# Altium PCB MD52-影石电池版-260903-MCU.PcbDoc
Units mm, origin at the board's own origin, x right, y up, seen from the top; angles counter-clockwise.
Board outline 82 x 22 mm, 4 copper layers (Top Layer, Mid-Layer1, Mid-Layer2, Bottom Layer), stack 0.778 mm thick; 59 components, 75 nets, 186 pads, 129 vias.
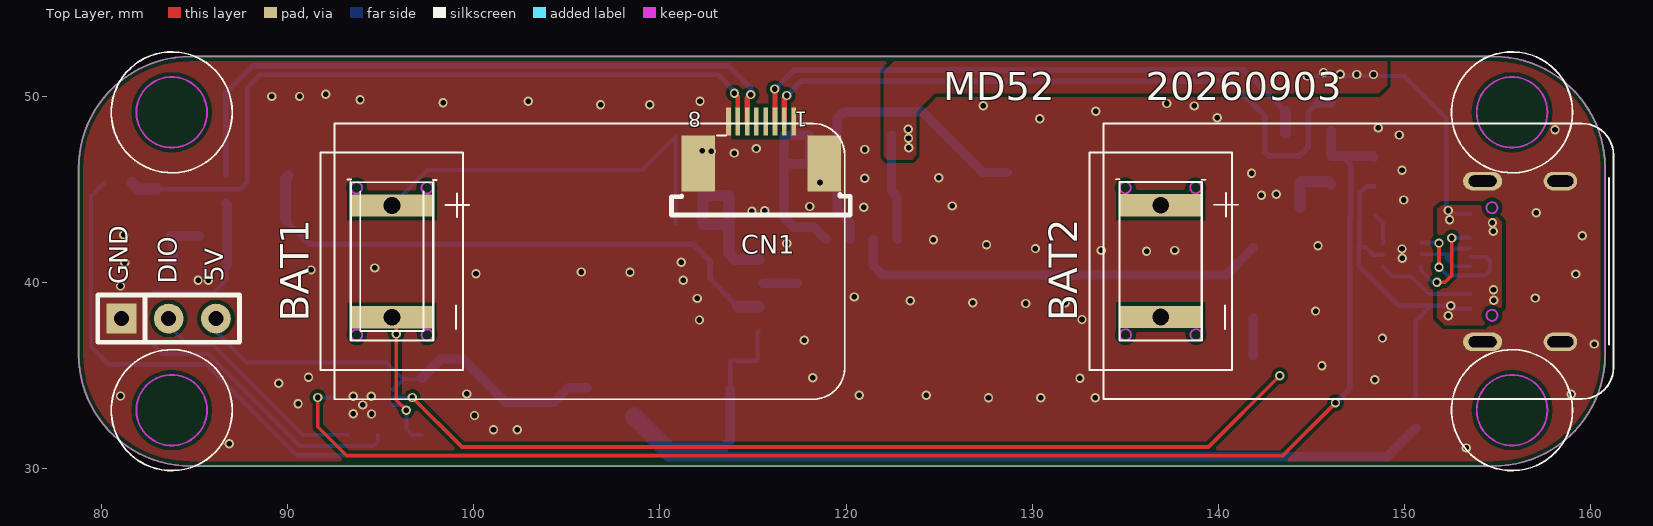
[diagram p0: Top Layer view]
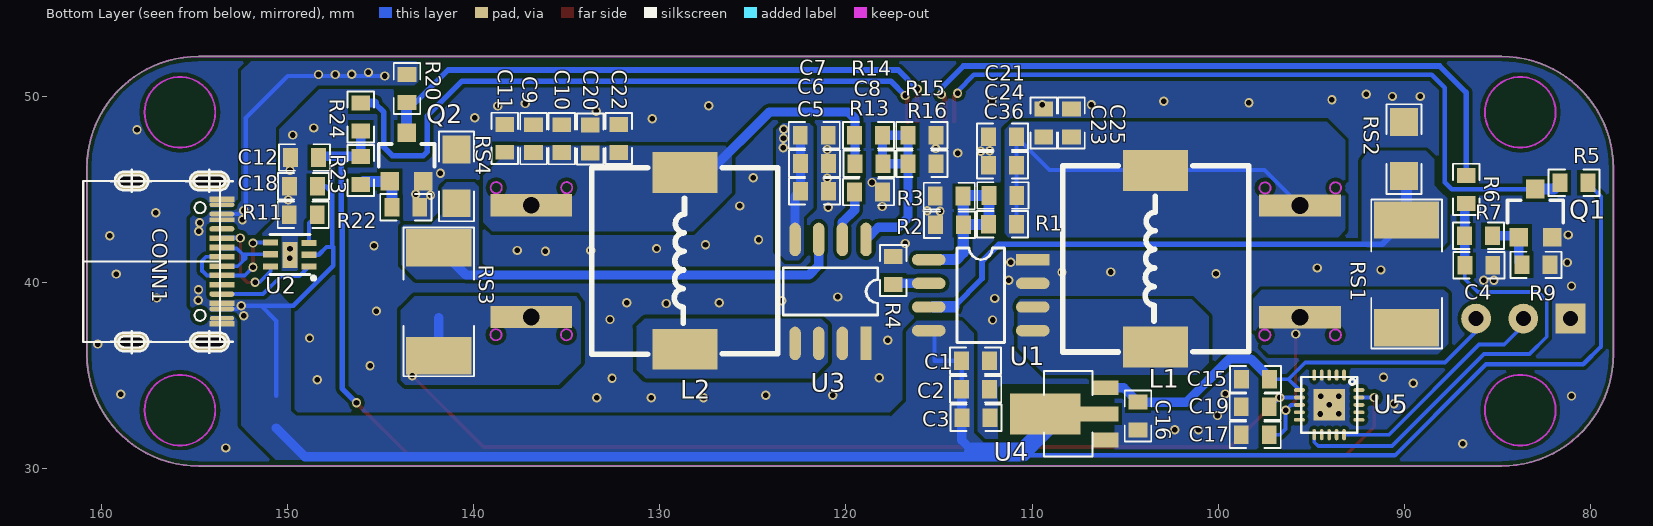
[diagram p1: Bottom Layer view, seen from below]

## Layer stack, top to bottom
Top Solder: solder mask 0.0102, Solder Resist, Dk 3.5
Top Layer: signal copper 0.0356
Dielectric 1: core 0.254, FR-4, Dk 4.2
Mid-Layer1: signal copper 0.036
Dielectric 3: prepreg 0.127, Dk 4.2
Mid-Layer2: signal copper 0.036
Dielectric 2: core 0.254, Dk 4.2
Bottom Layer: signal copper 0.0356
Bottom Solder: solder mask 0.0102, Solder Resist, Dk 3.5

## Board outline
78.774,36.137 ccw(c84.774,36.137) 84.774,30.137 154.774,30.137 ccw(c154.774,36.137) 160.774,36.137 160.774,46.137 ccw(c154.774,46.137) 154.774,52.137 84.774,52.137 ccw(c84.774,46.137) 78.774,46.137

## Design rules (kind name [scope] priority, off if disabled: settings)
Clearance [All] p1: gap=0.2
ComponentClearance [All] p1: gap=0 collisioncheckmode=3 verticalgap=0 showdistances=FALSE
PlaneConnect [All] p1: planeconnectstyle=Direct reliefexpansion=0.508 reliefentries=4 reliefconductorwidth=0.254 reliefairgap=0.254
PolygonConnect [All] p1: connectstyle=Direct reliefconductorwidth=0.254 reliefentries=4 polygonreliefangle="90 Angle" airgapwidth=0.254
RoutingVias [All] p1: holewidth=0.711 width=1.27 viastyle="Through Hole" minholewidth=0.3 minwidth=0.5 maxholewidth=0.711 maxwidth=1.27
SolderMaskExpansion [All] p1: expansion=0.102
Width [All] p1: maxlimit=10 minlimit=0.1 preferedwidth=0.15
28 further rules are at their usual default settings.

## Classes and differential pairs
component class HUSB337+SW6201+SW6201+SW6201+PY32F031(1)(3): C1 C3 C4 C6 C7 C9 C18 C21 C24 CONN1 L1 L2 R1 R3 R4 R6 R7 R9 R11 R14 R15 R16 RS3 RS4

## Components (designator, comment, footprint, x,y, rotation, side; value= is the part's Value field where it differs from the comment)
BAT1 "Comment" "电池座 -2-4PIN-2.0MM" 95.6,41.13 r90 top locked
BAT2 "Comment" "电池座 -2-4PIN-2.0MM" 136.9,41.14 r90 top locked
C1 "10uF/16V X7R 10%" 0603 113.04,35.79 r180 bottom locked
C2 "NC" 0603 113.03,34.26 r180 bottom locked (schematic designator C1)
C3 "NC" 0603 113.01,32.73 r180 bottom locked (schematic designator C9)
C4 "1uF/25V" 0603 86,40.93 r180 bottom locked
C5 "10uF/16V X7R 10%" 0603 121.69,44.9 r180 bottom locked (schematic designator C9)
C6 "10uF/16V X7R 10%" 0603 121.69,46.39 r180 bottom locked
C7 "NC" 0603 121.7,47.9 r180 bottom locked
C8 "1nf/50v" 0603 118.76,46.37 r180 bottom locked (schematic designator C7)
C9 "22uF/6.3V X5R" 0603 136.78,47.72 r90 bottom locked (schematic designator C3)
C10 "22uF/6.3V X5R" 0603 135.26,47.72 r90 bottom locked (schematic designator C3)
C11 "22uF/6.3V X5R" 0603 138.33,47.74 r90 bottom locked (schematic designator C3)
C12 "1uf/50v" 0603 149.09,46.71 r180 bottom locked (schematic designator C3)
C15 "2.2uf/50v" 0603 98,34.8 r0 bottom locked (schematic designator C3)
C16 "0.1uf/50v" 0603 104.31,32.82 r270 bottom locked (schematic designator C3)
C17 "0.1uf/50v" 0603 98.01,31.82 r180 bottom locked (schematic designator C3)
C18 "1uF/50V X7R 10%" 0603 149.13,45.16 r0 bottom locked
C19 "0.1uf/50v" 0603 98.01,33.32 r180 bottom locked (schematic designator C3)
C20 "22uF/6.3V X5R" 0603 133.74,47.71 r90 bottom locked (schematic designator C3)
C21 "22uF/6.3V X5R" 0603 111.59,47.82 r0 bottom locked
C22 "22uF/6.3V X5R" 0603 132.21,47.73 r90 bottom locked (schematic designator C3)
C23 "22uF/6.3V X5R" 0603 109.38,48.56 r90 bottom locked (schematic designator C3)
C24 "22uF/6.3V X5R" 0603 111.59,46.29 r0 bottom locked (schematic designator C27)
C25 "22uF/6.3V X5R" 0603 107.88,48.57 r90 bottom locked (schematic designator C3)
C36 "1nF/50V" 0603 111.57,44.67 r180 bottom locked (schematic designator C14)
CN1 "" 连接器0.5*8 115.45,47.52 r180 top locked
CONN1 "输入" "SMD-TYPEC_16Pin 卧式" 152.939,36.805 r0 bottom locked
L1 "4.7uH" "SMD-L WHC1040 锡膏" 103.36,36.52 r90 bottom locked
L2 "4.7uH" "SMD-L WHC1040 锡膏" 128.65,36.41 r90 bottom locked (schematic designator L3)
Q1 "2N7002" SOT323 82.96,43.82 r90 bottom locked
Q2 "2N7002" SOT323 143.6,46.83 r90 bottom locked
R1 "27K" 0603 111.58,43.12 r0 bottom locked
R2 "10K" 0603 114.44,43.1 r180 bottom locked (schematic designator R1)
R3 "470K" 0603 114.45,44.64 r180 bottom locked
R4 "82K" 0603 117.45,40.64 r90 bottom locked
R5 "10K" 0603 80.88,45.36 r0 bottom locked (schematic designator R1)
R6 "910k" 0603 86.68,45 r90 bottom locked
R7 "10K" 0603 86.01,42.5 r0 bottom locked
R9 "100K" 0603 82.93,40.94 r180 bottom locked
R11 "NC" 0603 149.15,43.64 r0 bottom locked
R13 "82K" 0603 118.78,44.86 r180 bottom locked (schematic designator R4)
R14 "27k" 0603 118.78,47.91 r180 bottom locked
R15 "470k" 0603 115.92,47.91 r180 bottom locked
R16 "10k" 0603 115.91,46.38 r180 bottom locked
R20 "10K" 0603 143.58,50.41 r270 bottom locked (schematic designator R4)
R22 "100K" 0603 143.64,44.03 r180 bottom locked (schematic designator R4)
R23 "10K" 0603 146.06,46.02 r270 bottom locked (schematic designator R4)
R24 "10K" 0603 146.06,48.89 r270 bottom locked (schematic designator R4)
RS1 "0.2/2WR" 2512 89.88,40.46 r270 bottom locked (schematic designator R4)
RS2 "30mR" 1206 90.02,47.16 r90 bottom locked (schematic designator R18)
RS3 "0.2R" 2512 141.87,38.96 r270 bottom locked (schematic designator R4)
RS4 "30mR" 1206 140.91,45.7 r270 bottom locked (schematic designator R21)
U1 "SP1233FL" SO8 115.55,41.22 r180 bottom locked
U2 "HUSB237" HUSB237 149.659,41.155 r0 bottom locked
U3 "SP1233FL" SO8 118.92,42.31 r270 bottom locked
U4 "ME6203A50PG" SOT-89 108.06,32.94 r0 bottom locked
U5 "WY8S8002A" QFN3*3-20 94.04,33.42 r270 bottom locked
? "" SIP3 81.07,38.06 r0 top locked

## Footprints (in the part's own frame and the unit in brackets; to place one, negate y for a bottom-side part, rotate by r counter-clockwise, add the part's x,y. Pads: shape width x height; smd on the part's side, far side on the other; paste and mask are expansions set on the pad)
0603 [mm]
  rect 0.8x1 smd: 1(0.75,0) 2(-0.75,0)
  silkscreen extent -1.37,-0.71 1.37,0.71
1206 [mm]
  rect 1.5x1.5 smd: 1(1.448,0) 2(-1.448,0)
  silkscreen extent -2.41,-0.94 2.41,0.94
2512 [mm]
  rect 2x3.5 smd: 1(2.9,0) 2(-2.9,0)
  silkscreen extent -4,-1.9 4,1.9
HUSB237 [mil]
  rect 31.5x13.23 smd: "1 CC1"(-32,12) "2 VBUS"(-32,-13) "3 VSET"(-32,-38) "4 D+"(49,-39) "5 D-"(49,-14) "6 "(49,12)
  rect 31.5x55.12 smd: EP(8,-13)
  silkscreen extent -45,-56 50,40
QFN3*3-20 [mm]
  oval 0.6x0.2 smd: 1(-1.6,0.8) 2(-1.6,0.4) 3(-1.6,0) 4(-1.6,-0.4) 5(-1.6,-0.8) 11(1.6,-0.8) 12(1.6,-0.4) 13(1.6,0) 14(1.6,0.4) 15(1.6,0.8)
  oval 0.2x0.6 smd: 6(-0.8,-1.6) 7(-0.4,-1.6) 8(0,-1.6) 9(0.4,-1.6) 10(0.8,-1.6) 16(0.8,1.6) 17(0.4,1.6) 18(0,1.6) 19(-0.4,1.6) 20(-0.8,1.6)
  rect 1.7x1.7 smd: 21(0,0)
  silkscreen extent -1.5,-1.5 1.5,1.5
SIP3 [mm]
  rect 1.6x1.6 hole 0.8: 1(0,0)
  round 1.6 hole 0.8: 2(2.54,0)
  round 1.6 hole 0.813: 3(5.08,0)
  silkscreen extent -1.27,-1.27 6.35,1.27
"SMD-L WHC1040 锡膏" [mm]
  rect 2.2x3.5 smd: 1(0,0) 2(9.492,0)
  silkscreen extent -0.26,-5 9.75,5, body extent -0.45,-5 9.95,5, height 3.9
"SMD-TYPEC_16Pin 卧式" [mm]
  oval 2.1x1 hole 0.6 slot 1.5 at 0 deg: 0(1.253,-8.64) 0(1.253,0)
  oval 1.8x1 hole 0.6 slot 1.4 at 0 deg: 0(5.433,-8.64) 0(5.433,0)
  round 0.3 on Bottom Overlay: 0(8.033,-4.32)
  rect 1.34x0.3 smd: A1(0.583,-7.67) A5(0.583,-5.57) A6(0.583,-4.57) A7(0.583,-4.07) A8(0.583,-3.07) A12(0.583,-0.97) B4(0.583,-2.07) B6(0.583,-3.57) B7(0.583,-5.07)
  oval 1.34x0.25 smd: A4(0.583,-6.87) A9(0.583,-1.77) B12(0.583,-7.37)
  oval 1.3x0.25 smd: B1(0.583,-1.27)
  oval 1.34x0.3 smd: B5(0.583,-2.57) B8(0.583,-6.07)
  rect 1.34x0.25 smd: B9(0.583,-6.57)
  Keep-Out Layer circle w0.1: c1.753,-1.43 r0.3
  Keep-Out Layer circle w0.1: c1.753,-7.21 r0.3
  silkscreen extent -0.03,-9.25 8.03,0.64
SO8 [mil]
  oval 70.87x24 smd: 1(0,0) 2(0,-50) 3(0,-100) 4(0,-150) 5(220,-150) 6(220,-100) 7(220,-50)
  rect 70.87x24 smd: 8(220,0)
  silkscreen extent 60,-175 160,25
SOT323 [mm]
  rect 1x1 smd: 1(-1.4,0.9) 2(1.2,0) 3(-1.4,-0.9)
  silkscreen extent -0.6,-1.5 0.6,1.5
SOT-89 [mm]
  rect 1.4x0.8 smd: 1(-2,1.4) 3(-2,-1.4)
  rect 5x0.8 smd: 2(-0.2,0)
  rect 3.8x2.2 smd: 2(1.225,0)
  silkscreen extent -1.3,-2.3 1.3,2.3
"电池座 -2-4PIN-2.0MM" [mm]
  rect 1.2x4.4 hole 0.9: 1(-3,0) 4(3,0)
  Keep-Out Layer circle w0.1: c-3.95,-1.898 r0.3
  Keep-Out Layer circle w0.1: c3.95,1.902 r0.3
  Keep-Out Layer circle w0.1: c-3.951,1.892 r0.3
  Keep-Out Layer circle w0.1: c3.949,-1.883 r0.3
  silkscreen extent -4.25,-4.14 4.4,2.4
连接器0.5*8 [mm]
  rect 0.25x1.5 smd paste+0 mask+0.051: 1(-1.732,-1.132) 2(-1.232,-1.132) 3(-0.732,-1.132) 4(-0.232,-1.132) 5(0.268,-1.132) 6(0.768,-1.132) 7(1.268,-1.132) 8(1.768,-1.132)
  rect 1.8x3 smd paste+0 mask+0.051: 9(3.388,1.132) 10(-3.388,1.122)
  silkscreen extent -4.78,-0.38 4.83,3.9

## Part data
C1 C2 C3 C4 C5 C6 C7 C8 C9 C10 C11 C12 C15 C16 C17 C19 C20 C21 C22 C23 C24 C25 C36: library part CAP0603, "Capacitor"
C18: library part Cap, "Capacitor"
CONN1: library part "TYPC C"
L1 L2: library part INDUCTOR_SPM1010, "INDUCTOR"
R1 R2 R3 R4 R5 R6 R7 R9 R11 R13 R14 R15 R16 R20 R22 R23 R24 RS1 RS2 RS3 RS4: library part RES_0603, "Resistor"

## Via types
v1: diameter 0.5, hole 0.3, Top Layer to Bottom Layer, 129 vias

## Nets (pads, with @x,y where several pads share a name; then routed paths per layer and width w, separated by ;. In a path a pad name is that pad's centre, name@x,y a point inside that pad or via, vN(x,y) a via of type N, cw(c..) or ccw(c..) an arc to the next point about the centre after c; other vN are vias at no path point)
12V: 
a1: "U2.3 VSET" R11.2 | length 1.7
  Bottom Layer w0.2: R11.2 148.846,43.194 148.846,42.12
a2: BAT1.1 C17.1 RS1.1 U5.8 | length 8.1
  Top Layer w0.2: BAT1.1 95.84,37.89 95.84,33.67 v1(96.38,33.13)
  Bottom Layer w0.2: U5.8 96.09,33.42 v1(96.38,33.13) 96.38,32.12 96.68,31.82 C17.1@97.21,31.82
  other v1: 95.83,37.23
a3: Q1.1 R7.2 R9.2 | length 3.2
  Bottom Layer w0.5: R9.2 83.86,41.12 Q1.1 Q1.1@83.94,42.5 ; Q1.1@83.72,42.5 R7.2
a4: C4.2 R6.2 R7.1 U5.11 | length 26.3
  Bottom Layer w0.2: C4.2 86.75,40.17 86.06,39.48 82.81,39.48 82.35,39.02 82.35,37.08 83.28,36.15 85.72,36.15 90.66,31.21 94.63,31.21 94.84,31.42 U5.11
  Bottom Layer w0.5: R6.2 86.75,44.18 C4.2
a5: 
a6: ?.3 C15.2 C16.2 U4.3 U5.6 | length 24.2
  Bottom Layer w0.2: ?.3 86.15,37.37 87.82,35.7 95.32,35.7 96.22,34.8 ; U5.6 96.22,34.8 ; C15.2@97.19,34.8 96.22,34.8
  Bottom Layer w0.5: C15.2@97.19,34.836 98.244,35.89 99.39,35.89 101.71,33.57 C16.2 105.08,34.34 U4.3
a7: R13.2 U3.2 | length 2.8
  Bottom Layer w0.5: R13.2 119.53,43.89 120.19,43.23 U3.2
A8: CONN1.A8
a9: BAT2.1 C19.1 RS3.1 U5.7 | length 53.1
  Top Layer w0.2: v1(96.7,33.82) 99.36,31.16 139.47,31.16 v1(143.3,34.99)
  Bottom Layer w0.2: U5.7 v1(96.7,33.82) C19.1@97.2,33.32
  Bottom Layer w0.5: RS3.1 141.87,38.11
b0: C12.1 R23.2 R24.1 U5.19 | length 76.3
  Top Layer w0.2: v1(91.62,33.82) 91.62,32.25 93.18,30.69 143.45,30.69 v1(146.29,33.53)
  Bottom Layer w0.2: v1(91.62,33.82) U5.19
  Bottom Layer w0.3: v1(146.29,33.53) 147.065,34.305 147.065,43.495 ; 146.66,46.77 147.12,46.31 147.12,43.55
  Bottom Layer w0.5: R24.1@146.07,48.15 R24.1 R23.2 146.66,46.77 148.28,46.77 C12.1
b1: Q2.1 R22.2 R23.1 | length 3.1
  Bottom Layer w0.58: R22.2 144.39,45.32 144.49,45.42 145.91,45.42 R23.1
b2: 
b3: 
b4: R4.2 U1.2 | length 1.8
  Bottom Layer w0.5: U1.2 R4.2@117.39,39.95
b5: 
b6: 
b7: 
B8: CONN1.B8
b9: 
BST1: 
BST2: 
CC1: "U2.1 CC1" CONN1.B5 | length 5.3
  Bottom Layer w0.2: 148.846,40.85 149.371,40.325 150.359,40.325 151.309,39.375 CONN1.B5
CC2: "U2.6 " CONN1.A5 | length 6.1
  Top Layer w0.2: v1(151.739,40.005) 152.169,40.005 152.539,40.375 v1(152.539,42.385)
  Bottom Layer w0.2: 150.903,40.85 150.903,40.6 151.499,40.005 v1(151.739,40.005) ; v1(152.539,42.385) 152.549,42.375 CONN1.A5 153.472,42.425 v1@152.746,42.425
cs1: RS1.2 RS2.2 U1.3 | length 30.3
  Bottom Layer w0.3: RS1.2 91.19,42.05 111.78,42.05 112.69,41.14 112.69,40.2 114.2,38.69
  Bottom Layer w0.6: RS1.2 89.88,45.572 RS2.2 ; 114.2,38.69 U1.3@115.32,38.69
cs2: RS3.2 RS4.1 U3.3 | length 22.6
  Bottom Layer w0.5: U3.3 121.46,40.92 121.98,40.4 140.41,40.4 RS3.2
dio: ?.2 U5.15 | length 12.3
  Bottom Layer w0.2: ?.2@83.415,37.885 84.64,36.66 85.99,36.66 90.83,31.82 U5.15
DM: "U2.5 D-" CONN1.A7 CONN1.B7 | length 5.3
  Bottom Layer w0.2: 150.903,41.51 152.256,41.51 ; 152.259,41.345 152.279,41.365 ; CONN1.A7 152.669,40.875 152.402,41.141 ; CONN1.B7 153.472,41.825 152.727,41.825 ; 152.256,41.51 152.256,41.287 152.402,41.141 ; 152.256,41.51 152.413,41.51 152.727,41.825 ; 152.402,41.141 152.402,41.365 152.402,41.499 152.727,41.825
DP: "U2.4 D+" CONN1.A6 CONN1.B6 | length 7
  Top Layer w0.2: v1(151.849,42.115) 151.849,40.825 v1(151.852,40.821)
  Bottom Layer w0.2: 150.903,42.145 151.818,42.145 v1(151.849,42.115) ; v1(151.852,40.821) 152.299,40.375 CONN1.B6 154.319,40.375 154.563,40.619 154.589,40.619 154.589,41.165 154.379,41.375 CONN1.A6
FB1: C36.2 R1.1 R2.1 R3.1 U1.1 | length 9.1
  Bottom Layer w0.6: R2.1 113.67,43.12 R1.1 112.32,43.13 C36.2 113.67,44.67 R3.1 113.7,41.6 114.07,41.23 U1.1@115.32,41.23
FB2: C8.1 R14.1 R15.2 R16.2 U3.1 | length 11.4
  Bottom Layer w0.5: U3.1 118.26,42.97 117.17,42.97 116.66,43.48 R16.2 ; R16.2 116.66,47.9 R15.2 R14.1 118.03,46.39 C8.1 116.67,46.37 R16.2
GND: ?.1 C1.1 C2.1 C3.1 C4.1 C5.1 C6.1 C7.1 C9.1 C10.1 C11.1 C12.2 C15.1 C16.1 C17.2 C18.1 C19.2 C20.1 C21.1 C22.1 C23.1 C24.1 C25.1 CN1.1 CN1.8 CN1.9 CN1.10 CONN1.0@154.192,36.805 CONN1.0@154.192,45.445 CONN1.0@158.372,36.805 CONN1.0@158.372,45.445 CONN1.A1 CONN1.A12 CONN1.B1 CONN1.B12 Q1.3 Q2.3 R2.2 R3.2 R4.1 R9.1 R11.1 R13.1 R15.1 R16.1 R22.1 RS2.1 RS4.2 U1.7 U1.8 U2.EP U3.7 U3.8 U4.1 U5.4 U5.21
  other v1: 153.32,31.11 86.87,31.34 101.06,32.08 102.33,32.08 100.04,32.85 94.51,32.93 93.52,32.94 94.04,33.42 90.56,33.48 127.65,33.81 130.46,33.81 133.38,33.81 81.02,33.9 93.52,33.88 94.5,33.89 120.71,33.94 124.31,33.94 158.96,33.99 99.63,34.01 89.53,34.58 148.4,34.78 132.56,34.85 118.21,34.88 91.12,34.9 145.56,35.53 160.19,36.69 117.76,36.9 148.81,37.01 112.12,37.98 132.67,38.01 145.22,38.46 129.65,38.87 126.81,38.91 131.77,38.91 123.45,39.01 112,39.14 157.02,39.16 120.43,39.22 81.02,39.81 85.19,40.11 85.74,40.11 111.26,40.12 159.19,40.45 100.12,40.46 108.39,40.55 105.77,40.56 91.26,40.67 94.68,40.78 81.25,41.07 111.15,41.09 149.872,41.295 136.14,41.68 133.71,41.72 137.66,41.72 149.86,41.8 130.17,41.82 145.35,41.97 127.54,42.03 116.81,42.09 124.69,42.3 159.54,42.51 81.2,42.55 157.08,43.74 114.94,43.83 115.63,43.85 120.94,44.04 118.05,44.08 125.7,44.11 149.95,44.43 142.31,44.69 143.11,44.74 118.6,45.37 121,45.6 124.98,45.62 141.78,45.86 149.86,46.02 113.99,46.95 112.76,47.05 112.28,47.07 121.01,47.14 115.18,47.19 149.71,47.92 158.08,48.2 148.58,48.3 130.41,48.79 139.93,48.85 133.41,49.2 127.36,49.49 138.7,49.48 106.81,49.55 109.45,49.55 137.23,49.61 98.35,49.65 102.93,49.73 112.15,49.73 93.89,49.82 89.15,49.99 90.64,49.99 92.04,50.11
GND1: 
LEDG_1: CN1.7 Q1.2 R5.1 | length 40.1
  Top Layer w0.25: v1(114,50.17) 114.182,49.988 CN1.7
  Bottom Layer w0.25: Q1.2 82.98,45 87.46,45 87.83,45.37 87.83,50.45 88.53,51.15 113.13,51.15 114,50.28 v1(114,50.17)
  Bottom Layer w0.6: R5.1 81.97,45.02 Q1.2
LEDG_2: CN1.3 Q2.2 R20.1 | length 31.7
  Top Layer w0.25: v1(116.17,50.39) 116.182,50.378 CN1.3
  Bottom Layer w0.3: v1(116.17,50.39) 117.19,51.41 141.37,51.41 143.6,49.18
  Bottom Layer w0.58: Q2.2 143.6,49.18
LEDG_3: 
LEDR_1: CN1.6 R6.1 | length 35.6
  Top Layer w0.3: CN1.6 114.682,49.892 v1(114.88,50.09)
  Bottom Layer w0.3: R6.1 86.68,50.202 88.103,51.625 113.685,51.625 114.87,50.44 114.87,50.1 v1(114.88,50.09)
LEDR_2: CN1.2 R24.2 | length 36.1
  Top Layer w0.3: CN1.2 116.682,49.902 v1(116.82,50.04)
  Bottom Layer w0.3: v1(116.82,50.04) 117.59,50.81 140.62,50.81 142.5,48.93 142.5,47.01 142.7,46.81 144.37,46.81 144.82,47.26 144.82,49.14 145.32,49.64
  Bottom Layer w0.5: 145.32,49.64 R24.2
LEDR_3: 
NetC14_1: 
NetC14_2: 
NetC15_1: 
NetC15_2: 
NetC16_1: 
NetC16_2: 
NetC17_1: 
NetC18_2: 
NetC19_1: 
NetC20_1: 
NetC21_2: 
NetC22_2: 
NetC23_2: 
NetNTC1_2: 
NetNTC2_2: 
NetNTC3_2: 
NetQ1_1: 
NetR1_2: 
NetR2_2: 
NetR3_2: 
NetR4_2: 
NetR5_2: 
NetR6_2: 
NetR15_2: 
NetR16_2: 
NetR17_2: 
NetR19_1: 
NetR22_1: 
NetR23_1: 
NewNet: 
SW1: L1.1 U1.5 U1.6
SW2: L2.1 U3.5 U3.6
VBAT1: BAT1.4 C21.2 C23.2 C24.2 C25.2 C36.1 L1.2 R1.2 | length 21.4
  Bottom Layer w0.2: BAT1.4 95.6,44.134 97.508,46.042 103.07,46.042 109.062,46.042 110.83,47.81 R1.2
VBAT2: BAT2.4 C8.2 C9.2 C10.2 C20.2 C22.2 L2.2 R14.2 | length 13.1
  Bottom Layer w0.5: C8.2 119.51,48.8 119.87,49.16 124.11,49.16 127.368,45.902 L2.2
VBAT3: 
VIN: "U2.2 VBUS" C1.2 C2.2 C3.2 C5.2 C6.2 C7.2 C18.2 CONN1.A4 CONN1.A9 CONN1.B4 CONN1.B9 R5.2 R20.2 U1.4 U3.4 U4.2 | length 134
  Bottom Layer w0.23: R5.2@80.18,45.36 79.44,44.62 79.44,36.55 80.39,35.6 85.62,35.6 86.26,34.96 90.51,30.71 111.09,30.71 111.27,30.89 ; C2.2 113.78,35.78 C1.2 115.24,35.79 115.24,37.34 U1.4@115.32,37.42 ; v1(144.77,51.09) 149.98,51.09 152.24,48.83 152.24,43.973 v1(152.349,43.865) ; 147.54,41.9 147.903,41.9 148.318,41.485 148.846,41.485 ; 150.6,33.91 150.6,37.93 151.423,38.753 ; 152.02,38.753 v1(152.479,38.753) ; v1@152.299,43.495 v1(152.419,43.375) ; v1@152.439,43.865 152.629,43.675 CONN1.A4 ; 152.719,38.575 CONN1.A9
  Bottom Layer w0.25: C18.2 147.935,45.16 147.595,44.82 147.595,41.955 147.54,41.9 147.54,40.89 149.677,38.753 151.423,38.753 152.02,38.753
  Bottom Layer w0.5: 112.897,30.637 149.057,30.637 150.6,32.18 ; 113.15,30.89 113.78,31.52 C2.2 ; C7.2 122.44,47.89 C6.2 C5.2 122.73,44.61 U3.4
  Bottom Layer w1: U4.2@108.63,32.77 110.51,30.89 111.27,30.89 113.15,30.89
  other v1: 152.339,38.215 154.799,39.045 154.779,39.605 154.769,42.745 154.719,43.205 123.36,47.24 123.35,47.74 123.34,48.23 147.43,51.17 148.33,51.17 146.55,51.18 145.65,51.28
pads on no net: C11.2 CN1.4 CN1.5 CONN1.0@160.972,41.125 U5.1 U5.2 U5.3 U5.5 U5.9 U5.10 U5.12 U5.13 U5.14 U5.16 U5.17 U5.18 U5.20

## Polygon pours and split planes (outlines as drawn)
GND on Bottom Layer "Bottom Layer-No Net" (solid, remove dead copper, pour order 22): 152.859,38.215 152.859,36.695 153.019,36.535 153.349,36.205 153.919,36.205 155.106,36.205 155.229,36.327 155.229,37.685 155.039,37.875 154.689,38.225 154.249,38.225
VBAT1 on Bottom Layer "Bottom Layer-No Net" (solid, remove dead copper, pour order 16): 93.19,42.79 93.54,42.44 111.27,42.44 111.48,42.65 111.48,42.76 111.48,48.21 111.17,48.52 111.06,48.63 109.65,48.63 94.18,48.63 93.18,47.63 93.18,42.78
SW1 on Bottom Layer "Bottom Layer-No Net" (solid, remove dead copper, pour order 18): 101.14,35.04 109.33,35.04 110.66,36.37 110.78,36.49 110.78,38.94 110.63,39.09 110.24,39.09 101.42,39.09 100.5,38.17 100.5,35.68
SW2 on Bottom Layer "Bottom Layer-No Net" (solid, remove dead copper, pour order 19): 120.97,35.71 120.97,37.69 121.28,38 121.33,38.05 130.42,38.05 130.81,38.05 131.25,37.61 131.23,37.59 131.23,35.99 131.23,35.31 130.76,34.84 121.87,34.84 121.85,34.82
VIN on Bottom Layer "Bottom Layer-No Net" (solid, remove dead copper, pour order 21): 116.2,37.94 113.79,37.94 113.49,37.64 113.12,37.27 113.12,35.1 113.12,31.92 111.68,30.48 150.64,30.48 152.04,31.88 152.49,32.33 152.49,37.62 152.49,38.08 152.7,38.29 152.75,38.34 154.29,38.34 154.82,38.34 155.12,38.64 155.22,38.74 155.22,43.44 154.77,43.89 154.13,43.89 152.97,43.89 152.78,44.08 152.47,44.39 152.47,44.43 152.47,51.36 152.11,51.72 151.83,52 144.12,52 143.16,52 142.98,51.82 142.98,50.78 143.18,50.58 144.09,50.58 148.37,50.58 150.64,48.31 150.64,43.64 151.73,42.55 151.73,40.73 150.83,39.83 149.81,38.81 149.81,36.77 149.81,33.11 149.53,32.83 117.65,32.83 117.6,32.78 116.77,33.61 116.77,33.69 116.77,37.36 116.63,37.5
a9 on Bottom Layer "Bottom Layer-No Net" (solid, remove dead copper, pour order 23): 134.48,39.25 143.17,39.25 143.7,38.72 143.91,38.51 143.91,36.36 143.91,34.74 143.77,34.6 143.66,34.49 142.64,34.49 135.42,34.49 134.24,35.67 134.24,38.91
VBAT2 on Bottom Layer "Bottom Layer-No Net" (solid, remove dead copper, pour order 24): 126.48,47.35 137.85,47.35 138.22,46.98 139.47,45.73 139.47,44.81 139.47,43.23 139.23,42.99 138.99,42.75 138.33,42.75 128.2,42.75 126.89,44.06 126.13,44.82 126.13,46.8
cs1 on Bottom Layer "Bottom Layer-No Net" (solid, remove dead copper, pour order 25): 92.29,46.56 92.29,42.16 92.03,41.9 87.95,41.9 87.7,42.15 87.7,43.53 87.7,44.51 88.09,44.9 88.4,45.21 88.4,45.93 88.4,46.62 88.75,46.97 88.85,47.07 91.94,47.07
cs2 on Bottom Layer "Bottom Layer-No Net" (solid, remove dead copper, pour order 26): 139.71,45.14 139.71,40.95 139.18,40.42 139.44,40.16 141.15,40.16 143.09,40.16 143.71,40.78 143.88,40.95 143.88,42.85 143.88,42.97 143.78,43.07 143.75,43.1 143.11,43.1 142.28,43.1 142.16,43.22 141.72,43.66 141.72,45.09 141.44,45.37 139.97,45.37
VIN on Bottom Layer "Bottom Layer-No Net" (solid, remove dead copper, pour order 27): 122.27,41.48 122.27,43.5 122.06,43.71 121.75,44.02 121.75,44.82 121.75,48.35 121.93,48.53 121.95,48.55 123.06,48.55 123.38,48.55 123.5,48.43 123.73,48.2 123.73,44.12 123.73,41.69 123.47,41.43 123.23,41.19 122.98,41.19 122.52,41.19
GND on Bottom Layer "Bottom Layer-No Net" (solid, remove dead copper, pour order 30): 78.74,35.98 78.74,33.6 82.26,30.08 157.26,30.08 160.78,33.6 160.78,48.63 157.25,52.16 82.26,52.16 78.82,48.72
a2 on Bottom Layer "Bottom Layer-No Net" (solid, remove dead copper, pour order 17): 87.88,39.6 97.66,39.6 97.88,39.38 98.13,39.13 98.13,38.27 98.13,36.97 98.06,36.9 97.29,36.13 96.61,36.13 88.21,36.13 87.94,36.4 87.64,36.7 87.64,39.4
VIN on Top Layer "Bottom Layer-No Net" (solid, remove dead copper, pour order 20): 151.999,44.145 154.339,44.145 155.059,43.425 155.219,43.265 155.219,38.745 155.219,38.545 154.689,38.015 154.379,37.705 152.329,37.705 152.149,37.705 151.859,37.995 151.749,38.105 151.749,43.945
VIN on Top Layer "Bottom Layer-No Net" (solid, remove dead copper, pour order 28): 123.76,46.86 123.76,49.15 124.39,49.78 124.76,50.15 128.12,50.15 148.61,50.15 148.97,50.51 149.06,50.6 149.06,51.98 148.87,52.17 146.56,52.17 122.87,52.17 122.13,51.43 122.03,51.33 122.03,47.57 122.03,46.77 122.23,46.57 122.26,46.6 123.55,46.6
GND on Top Layer "Bottom Layer-No Net" (solid, remove dead copper, pour order 29): 78.65,35.94 78.65,33.56 82.17,30.04 157.17,30.04 160.69,33.56 160.69,48.59 157.16,52.12 82.17,52.12 78.73,48.68

## Keep-outs
Keep-Out Layer:
  circle w0.1: c83.774,49.137 r1.9
  circle w0.1: c83.774,33.137 r1.9
  circle w0.1: c155.774,49.137 r1.9
  circle w0.1: c155.774,33.137 r1.9
  lines w0.1: 78.765,36.137 78.765,46.137 ; 78.774,36.137 ccw(c84.774,36.137) 84.774,30.137 154.774,30.137 ccw(c154.774,36.137) 160.774,36.137 160.774,46.137 ccw(c154.774,46.137) 154.774,52.137 84.774,52.137 ccw(c84.774,46.137) 78.774,46.137

## Other copper
Bottom Layer:
  pour cut-out: 105.56,34.57 111.61,34.57 111.84,34.34 111.84,30.12 105.81,30.12 105.56,29.87

## Silkscreen, mask and mechanical layers (free items; w line width, h text height)
Top Overlay:
  circle w0.1: c155.774,33.137 r3.25
  circle w0.1: c155.774,49.137 r3.25
  circle w0.1: c83.774,33.137 r3.25
  circle w0.1: c83.774,49.137 r3.25
  lines w0.1: 92.524,33.737 92.524,48.537 103.774,48.537 ; 92.536,33.726 118.227,33.726 ccw(c118.227,35.426) 119.927,35.426 ; 93.374,45.387 93.374,36.887 97.827,36.887 97.827,45.387 ; 93.901,44.887 93.901,37.387 97.301,37.387 97.301,44.887 ; 103.6,48.537 118.227,48.537 ; 118.224,48.537 cw(c118.224,46.837) 119.924,46.837 ; 119.924,35.407 119.924,46.84 ; 134.674,45.387 134.674,36.887 139.127,36.887 139.127,45.387 ; 160.974,36.667 160.974,45.607 ; 91.774,35.287 91.774,46.987 99.427,46.987 99.427,35.287 91.774,35.287 ; 133.074,35.287 140.727,35.287 140.727,46.987 133.074,46.987 133.074,35.287 ; 133.824,33.737 159.524,33.737 ccw(c159.524,35.437) 161.224,35.437 161.224,46.837 ccw(c159.524,46.837) 159.524,48.537 133.824,48.537 133.824,33.737
  text "MD52" at 125.23,49.79 h1.5
  text "20260903" at 136.1,49.79 h1.5
  text "5V" at 86.53,40.04 h1 r90
  text "DIO" at 84.04,39.93 h1 r90
  text "GND" at 81.4,39.89 h1 r90

## Text inside footprints (layer, text, board x,y; h text height)
CN1: Top Overlay "8" at 112.229,49.16 h0.8 r180; Top Overlay "1" at 117.944,49.16 h0.8 r180